# Altium PCB PCB1.PcbDoc
Units mm, origin at the board's own origin, x right, y up, seen from the top; angles counter-clockwise.
Board outline 100.03 x 70 mm, 2 copper layers (L1, L2), stack 1.671 mm thick; 30 components, 25 nets, 116 pads, 81 vias.
Unrouted connection lines stored in the file: 12.
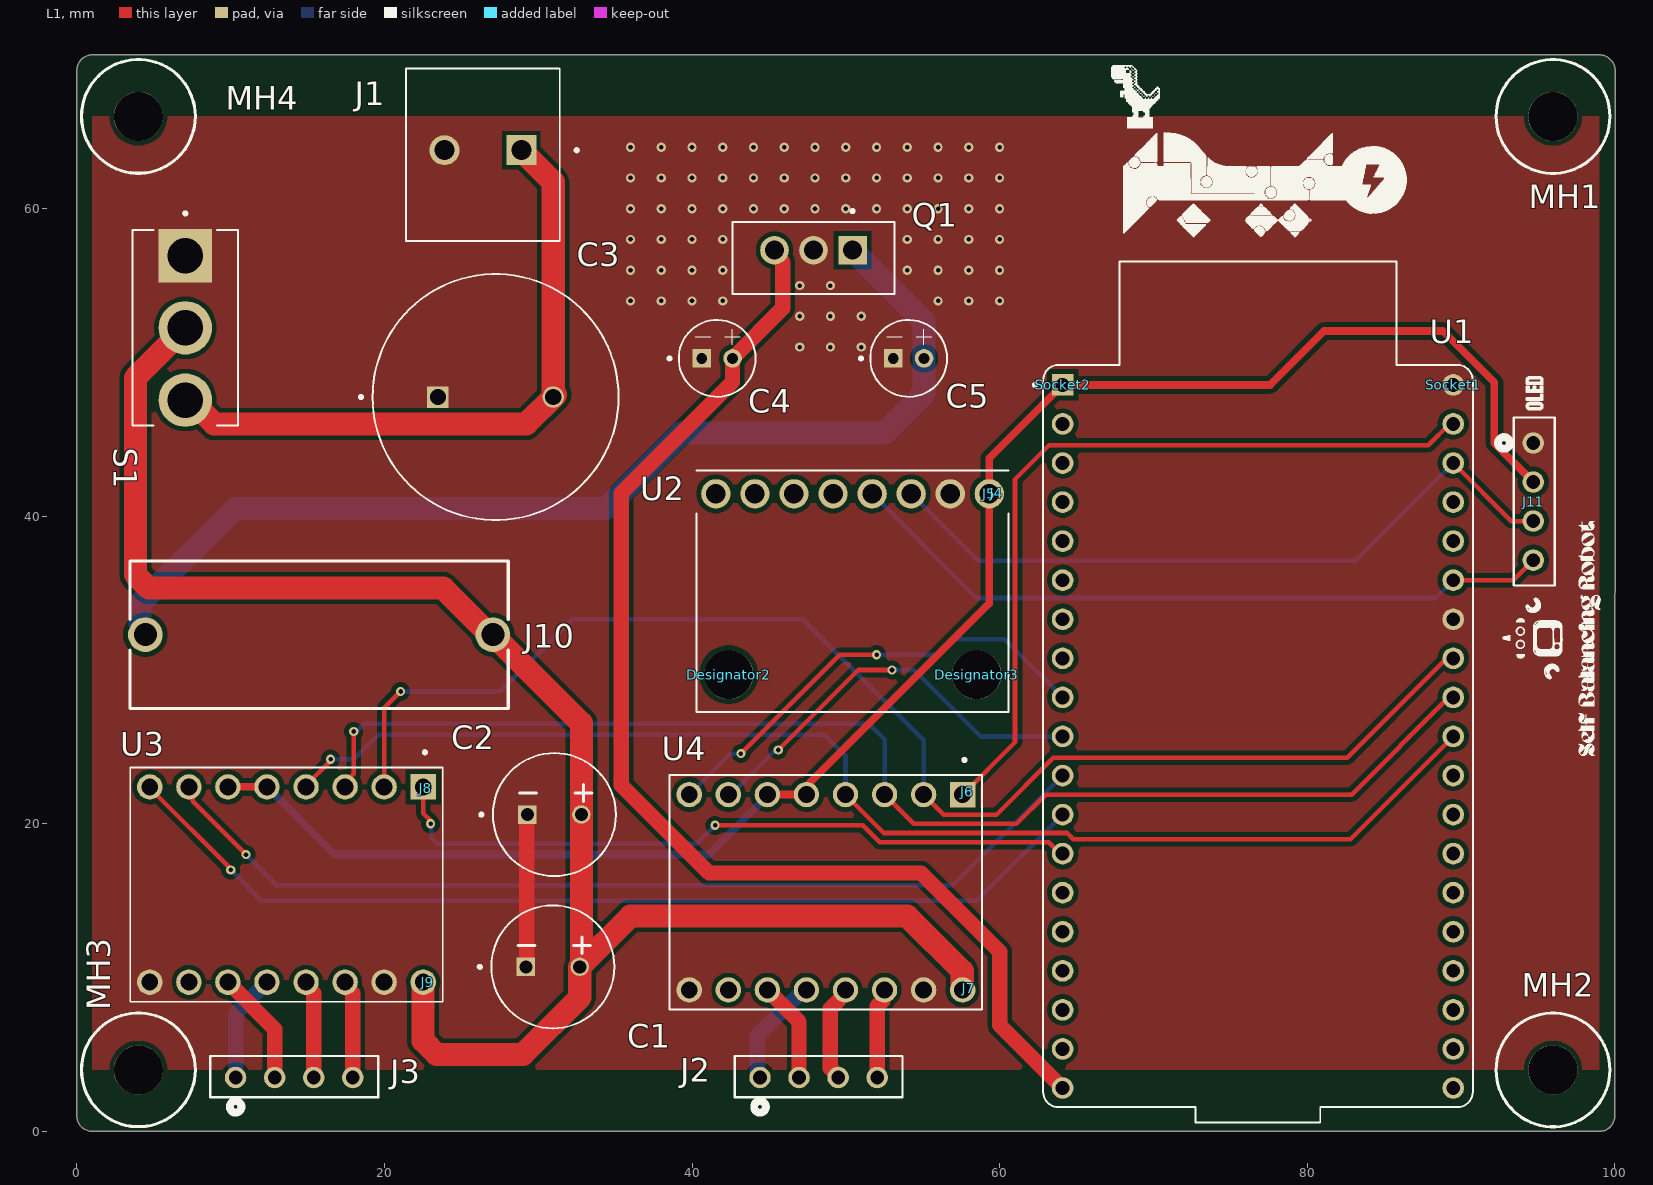
[diagram p0: L1 view]
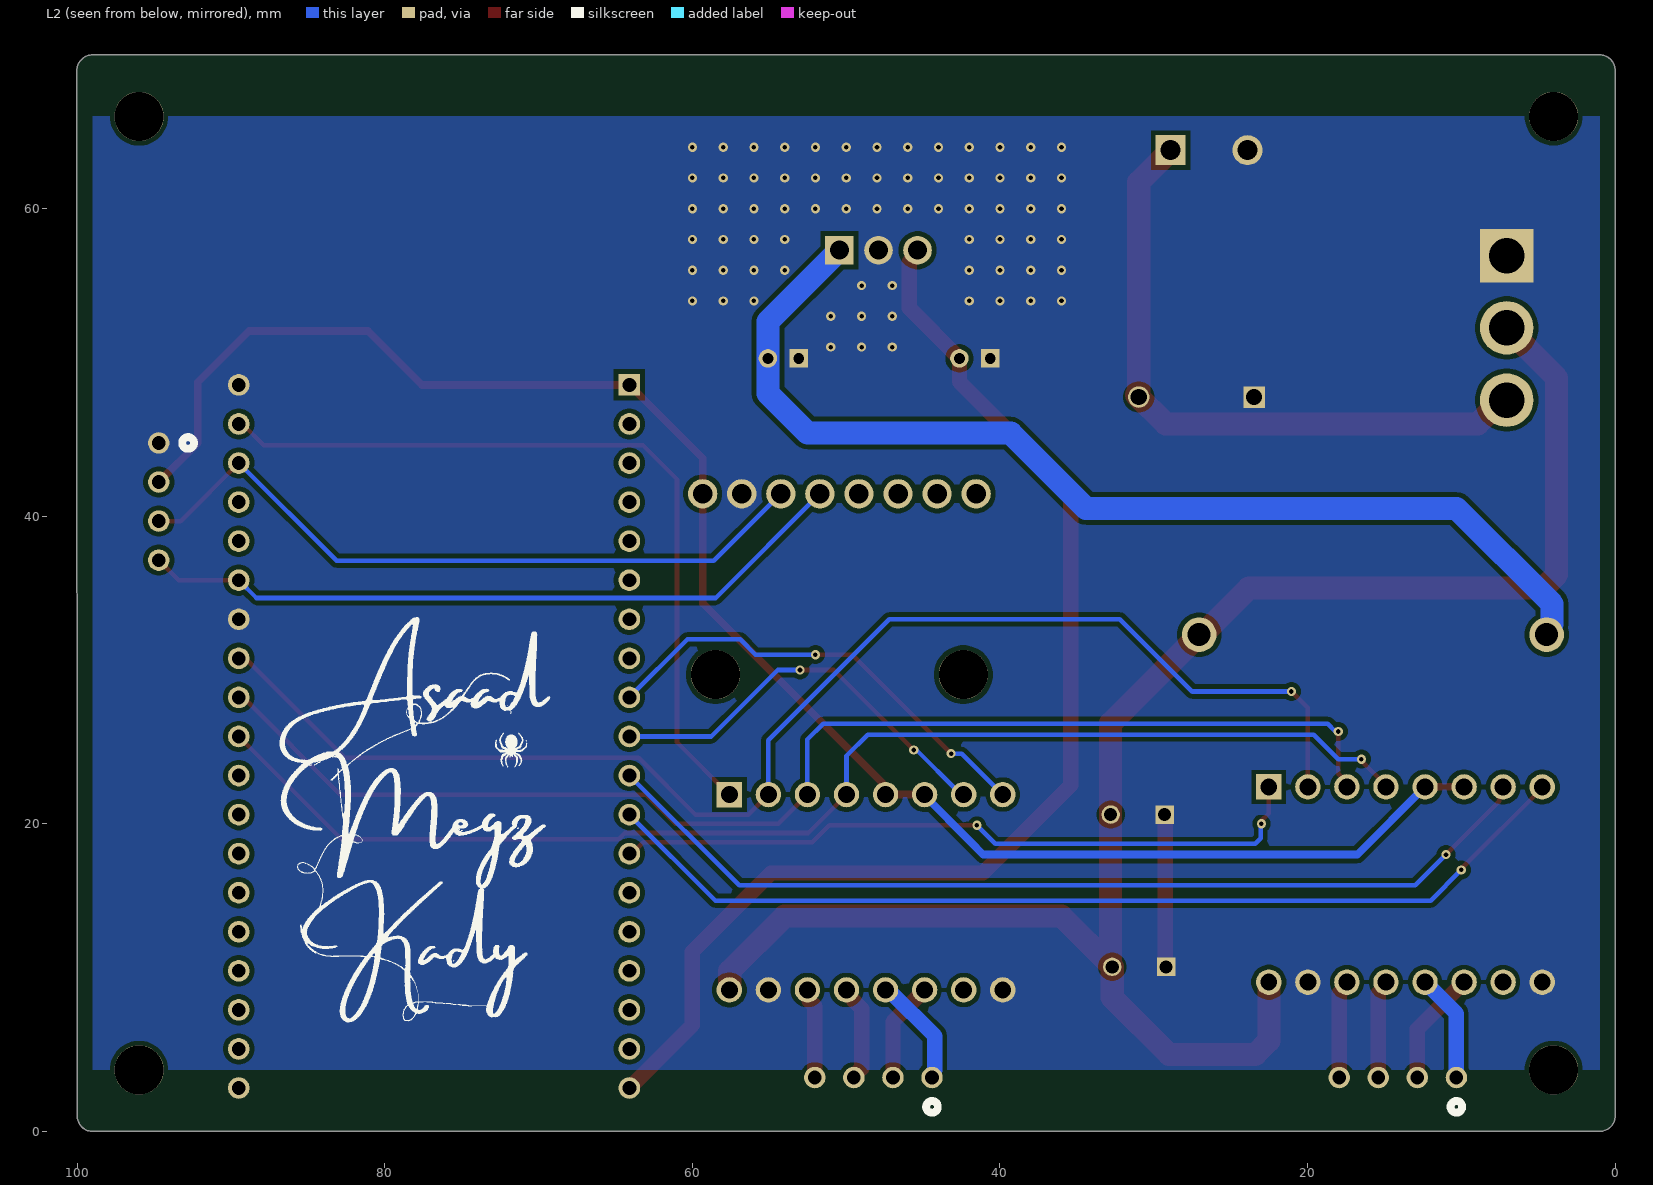
[diagram p1: L2 view, seen from below]
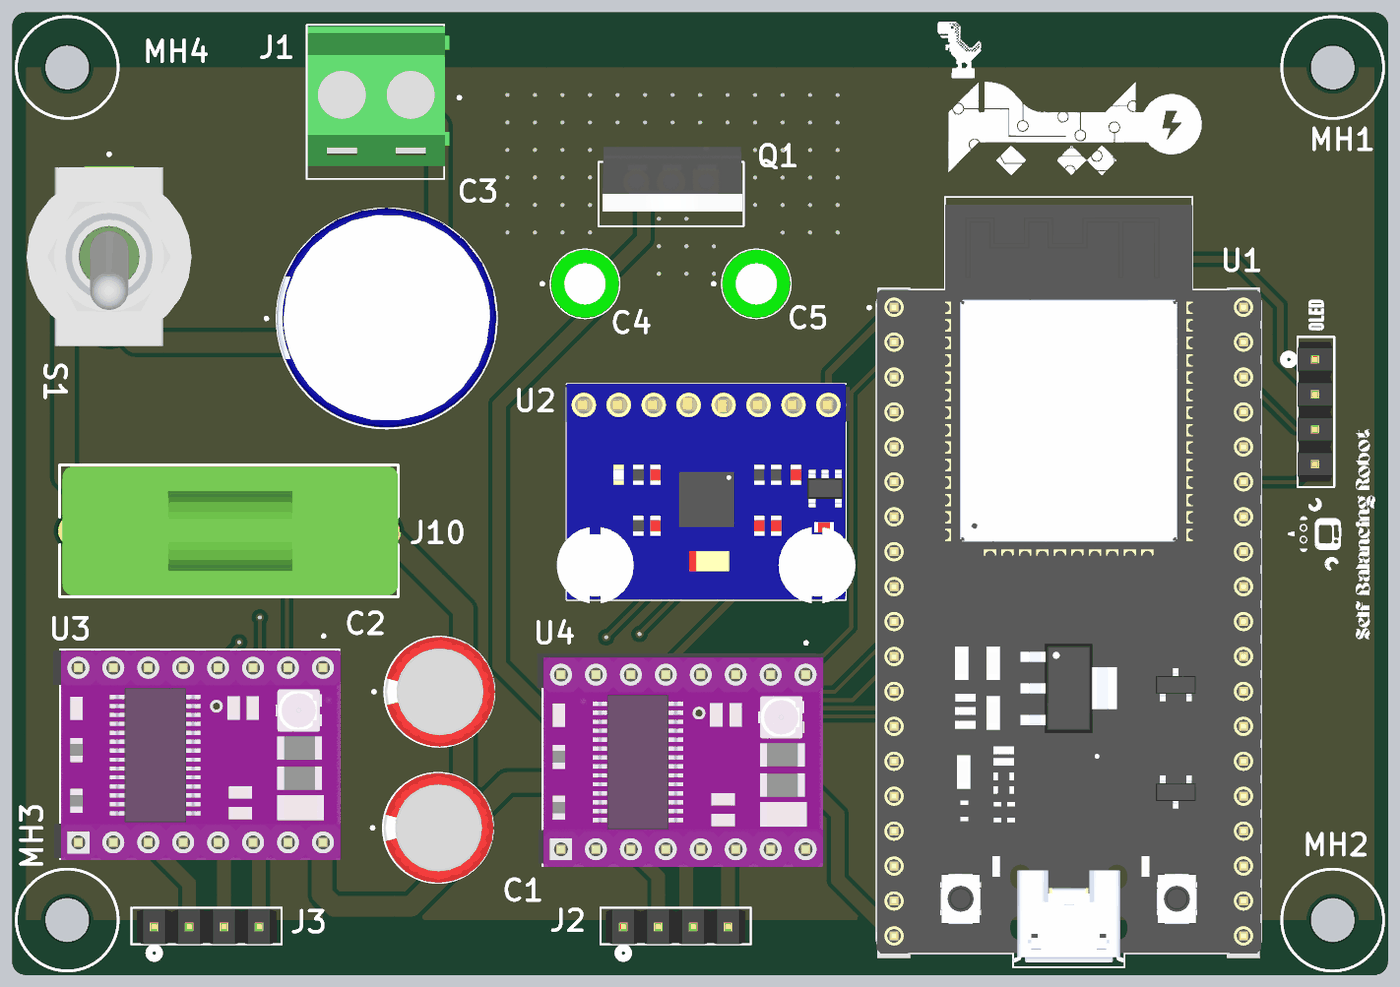
[diagram p2: 3D render of the assembled board from above, using the file's embedded part models]

## Layer stack, top to bottom
Top Solder: solder mask 0.0102, Solder Resist, Dk 3.5
L1: signal copper 0.0356
Dielectric 1: dielectric 1.6, FR-4, Dk 4.8
L2: signal copper 0.0356
Bottom Solder: solder mask 0.0102, Solder Resist, Dk 3.5

## Board outline
0,1 0,69 cw(c1,69) 1,70 99,70 cw(c99,68.975) 100.025,68.975 100,1 cw(c99,1) 99,0 1,0 cw(c1,1)

## Design rules (kind name [scope] priority, off if disabled: settings)
Clearance [All] p1: gap=0.3 ignorepadtopadclearanceinfootprint=FALSE
ComponentClearance [All] p1: gap=0 collisioncheckmode=3 verticalgap=0 showdistances=FALSE
Height [All] p1: minheight=0 maxheight=50 prefheight=12.7
HoleSize [All] p1: absolutevalues=TRUE maxlimit=10 minlimit=0.2 maxpercent=80.000 minpercent=20.000
HoleToHoleClearance [All] p1: gap=0.3 allowstackedmicrovias=TRUE
MinimumSolderMaskSliver [All] p1: minsoldermaskwidth=0.1
PlaneClearance [All] p1: clearance=1
PlaneConnect [All] p1: planeconnectstyle=NoConnect reliefexpansion=0.508 reliefentries=4 reliefconductorwidth=0.254 reliefairgap=0.254
PolygonConnect [All] p1: connectstyle=Direct reliefconductorwidth=0.254 reliefentries=4 polygonreliefangle="90 Angle" airgapwidth=0.254
RoutingVias [All] p1: holewidth=0.3 width=0.6 viastyle="Through Hole" minholewidth=0.3 minwidth=0.6 maxholewidth=0.3 maxwidth=0.6
SilkToSilkClearance [All] p1: silktosilkclearance=0.1
SilkToSolderMaskClearance [IsPad] p1: minsilkscreentomaskgap=0.1 clearancetoexposedcopper=TRUE
SolderMaskExpansion [All] p1: expansion=0.1 istentingtop=FALSE
SupplyNets "Schematic Supply Nets_5" [InNet('+12V')] p1: voltage=0.000
SupplyNets "Schematic Supply Nets_4" [InNet('VOUT_5V')] p2: voltage=0.000
SupplyNets "Schematic Supply Nets_3" [InNet('+3V3')] p3: voltage=0.000
SupplyNets "Schematic Supply Nets_2" [InNet('Vsupply')] p4: voltage=0.000
SupplyNets "Schematic Supply Nets" [InNet('GND')] p5: voltage=0.000
UnRoutedNet [All] p1: checkbadconnections=TRUE
Width [All] p1: maxlimit=1.5 minlimit=0.3 preferedwidth=0.3
20 further rules are at their usual default settings.

## Components (designator, comment, footprint, x,y, rotation, side; value= is the part's Value field where it differs from the comment)
C1 "CAP 100µF" CAP_1µF 30.9,10.7 r0 top
C2 "CAP 100µF" CAP_1µF 31,20.6 r0 top
C3 "2200µF" "CAP 2200UF" 27.2,47.75 r0 top
C4 "0.1µF" "CAP 0.1UF" 41.61,50.264 r0 top
C5 "0.33µF" "CAP 0.1UF" 54.063,50.264 r0 top
Designator2 "Comment" 3M-SCREW 42.38,29.7 r0 top
Designator3 "Comment" 3M-SCREW 58.5,29.7 r0 top
J1 "Terminal Block 2" "TERMINAL BLOCK 2" 28.9,63.8 r180 top
J2 "MHDR_4PINS" MHDR_4PINS 44.407,3.479 r0 top
J3 "MHDR_4PINS" MHDR_4PINS 10.307,3.479 r0 top
J4 "Female_Headers_Stepper" FEMALE_STEPPER 59.8,41.5 r180 top
J5 "MHDR_8PINS" MHDR_8PINS 59.33,41.46 r180 top
J6 "Female_Headers_Stepper" FEMALE_STEPPER 57.9,22.1 r180 top
J7 "Female_Headers_Stepper" FEMALE_STEPPER 58,9.3 r180 top
J8 "Female_Headers_Stepper" FEMALE_STEPPER 22.7,22.3 r180 top
J9 "Female_Headers_Stepper" FEMALE_STEPPER 22.8,9.7 r180 top
J10 "Fuse_Holder" FUSE_HOLDER 15.75,32.3 r0 top
J11 "MHDR_4PINS" MHDR_4PINS 94.679,44.778 r270 top
MH1 "MH_7.4MMNC_3.2MMD (NO COPPER-NPTH)" MH_7.4MMC_3.2MMD_NO_COPPER_NPTH 96,66 r0 top
MH2 "MH_7.4MMNC_3.2MMD (NO COPPER-NPTH)" MH_7.4MMC_3.2MMD_NO_COPPER_NPTH 96,4 r0 top
MH3 "MH_7.4MMNC_3.2MMD (NO COPPER-NPTH)" MH_7.4MMC_3.2MMD_NO_COPPER_NPTH 4.016,4.005 r0 top
MH4 "MH_7.4MMNC_3.2MMD (NO COPPER-NPTH)" MH_7.4MMC_3.2MMD_NO_COPPER_NPTH 4.016,66.005 r0 top
Q1 "LM7805" LM7805 50.398,57.321 r180 top
S1 "Switch" SWITCH 7.05,52.25 r270 top
Socket1 "Female_Headers_FOR_MCU" FEMALE_HEADERS 89.5,48.54 r270 top
Socket2 "Female_Headers_FOR_MCU" FEMALE_HEADERS 64.1,48.54 r270 top
U1 "ESP_32" ESP_32 64.1,48.565 r0 top
U2 "GYROSCOPE" GYROSCOPE 59.322,41.438 r270 top
U3 "DRV8825 Stepper Driver" "DRV8825 STEPPER DRIVER" 22.5,22.393 r270 top
U4 "DRV8825 Stepper Driver" "DRV8825 STEPPER DRIVER" 57.58,21.893 r270 top

## Footprints (in the part's own frame and the unit in brackets; to place one, negate y for a bottom-side part, rotate by r counter-clockwise, add the part's x,y. Pads: shape width x height; smd on the part's side, far side on the other; paste and mask are expansions set on the pad)
3M-SCREW [mm]
  body extent -2.8,-2.67 2.8,2.87, height 13
"CAP 0.1UF" [mm]
  rect 1.208x1.208 / inner round 1.208 / far side rect 1.208x1.208 hole 0.7: N(-0.975,0)
  round 1.208 hole 0.7: P(1.025,0)
  silkscreen extent -3.17,-2.5 2.53,2.5, body extent -2.47,-2.49 2.53,2.49, height 12
"CAP 2200UF" [mm]
  rect 1.4x1.4 hole 1.05: N(-3.725,0)
  round 1.4 hole 1.05: P(3.775,0)
  silkscreen extent -8.82,-8 8.03,8, body extent -7.98,-7.95 8.03,8.05, height 25.01
CAP_1µF [mm]
  rect 1.2x1.2 / inner round 1.2 / far side rect 1.2x1.2 hole 0.85: N(-1.7,0)
  round 1.2 hole 0.85: P(1.8,0)
  silkscreen extent -4.8,-4 4.05,4, body extent -3.9,-4 4.1,4, height 11.74
"DRV8825 STEPPER DRIVER" [mm]
  rect 1.65x1.65 hole 1.1: 1(-0.007,0.02)
  round 1.65 hole 1.1: 2(-0.007,-2.52) 3(-0.007,-5.06) 4(-0.007,-7.6) 5(-0.007,-10.14) 6(-0.007,-12.68) 7(-0.007,-15.22) 8(-0.007,-17.76) 9(12.693,-17.76) 10(12.693,-15.22) 11(12.693,-12.68) 12(12.693,-10.14) 13(12.693,-7.6) 14(12.693,-5.06) 15(12.693,-2.52) 16(12.693,0.02)
  silkscreen extent -2.36,-19.03 13.96,1.29, body extent -1.22,-18.96 14.02,1.36, height 14.49
ESP_32 [mm]
  rect 1.408x1.408 / inner round 1.408 / far side rect 1.408x1.408 hole 0.9: J2_1(0,-0.025)
  round 1.408 hole 0.9: J2_2(0,-2.565) J2_3(0,-5.105) J2_4(0,-7.645) J2_5(0,-10.185) J2_6(0,-12.725) J2_7(0,-15.265) J2_8(0,-17.805) J2_9(0,-20.345) J2_10(0,-22.885) J2_11(0,-25.425) J2_12(0,-27.965) J2_13(0,-30.505) J2_14(0,-33.045) J2_15(0,-35.585) J2_16(0,-38.125) J2_17(0,-40.665) J2_18(0,-43.205) J2_19(0,-45.745) J3_1(25.4,-0.025) J3_2(25.4,-2.565) J3_3(25.4,-5.105) J3_4(25.4,-7.645) J3_5(25.4,-10.185) J3_6(25.4,-12.725) J3_7(25.4,-15.265) J3_8(25.4,-17.805) J3_9(25.4,-20.345) J3_10(25.4,-22.885) J3_11(25.4,-25.425) J3_12(25.4,-27.965) J3_13(25.4,-30.505) J3_14(25.4,-33.045) J3_15(25.4,-35.585) J3_16(25.4,-38.125) J3_17(25.4,-40.665) J3_18(25.4,-43.205) J3_19(25.4,-45.745)
  silkscreen extent -1.9,-47.99 26.67,8.01, body extent -1.27,-47.66 26.67,7.44, height 15.19
FEMALE_HEADERS [mm]
  body extent -1.47,-1.21 47.3,1.21, height 8.51
FEMALE_STEPPER [mm]
  body extent -1.08,-1.3 19.73,1.2, height 8.55
FUSE_HOLDER [mm]
  round 2.25 hole 1.5: 1(-11.3,0) 2(11.3,0)
  silkscreen extent -12.3,-4.8 12.3,4.8, body extent -12.1,-4.7 12.3,4.7, height 24.2
GYROSCOPE [mm]
  round 1.905 hole 1.27 mask+0.102: AD0(-0.022,-15.232) GND(-0.022,-2.532) INT(-0.022,-17.772) SCL(-0.022,-5.072) SDA(-0.022,-7.612) VCC(-0.022,0.008) XCL(-0.022,-12.692) XDA(-0.022,-10.152)
  round 3.2 hole 3.2 unplated mask+0: ""(11.738,-0.822) ""(11.738,-16.942)
  silkscreen extent -1.54,-19.03 14.16,1.27, body extent -1.54,-19.03 14.16,1.27, height 13.6
LM7805 [mm]
  rect 1.86x1.86 / inner round 1.86 / far side rect 1.86x1.86 hole 1.24: 1(-0.042,0.021)
  round 1.86 hole 1.24: 2(2.498,0.021) 3(5.038,0.021)
  silkscreen extent -2.77,-2.62 7.77,2.88, body extent -2.66,-2.9 7.5,1.8, height 15.49
MH_7.4MMC_3.2MMD_NO_COPPER_NPTH [mm]
  round 3.2 hole 3.2 unplated: 1(-0.016,-0.005)
  silkscreen extent -3.72,-3.7 3.68,3.69
MHDR_4PINS [mil]
  round 55 / inner round 60 / far side round 55 hole 35 paste-99999 mask+0: 1(0.51,0.83) 2(100.51,0.83) 3(200.51,0.83) 4(300.51,0.83)
  silkscreen extent -64,-89 366,56, body extent -49,-49 351,51, height 500
MHDR_8PINS [mm]
  body extent -1.3,-1.27 19.15,1.27, height 13.64
SWITCH [mil]
  rect 137x137 / inner round 137 / far side rect 137x137 hole 91: 1(-185,0)
  round 137 hole 91: 2(0,0) 3(185,0)
  silkscreen extent -297,-135 250,135, body extent -256,-236 256,236, height 1157
"TERMINAL BLOCK 2" [mm]
  rect 1.95x1.95 / inner round 1.95 / far side rect 1.95x1.95 hole 1.3: 1(0,0)
  round 1.95 hole 1.3: 2(5,0)
  silkscreen extent -3.7,-5.3 7.5,5.9, body extent -2.86,-5.21 7.44,4.99, height 14.1

## Part data
C3: library part "CAP 2200µF"
C4: library part "CAP 0.1µF"
C5: library part "CAP 0.33µF"
MH1 MH2 MH3 MH4: library part MH_7.4MMNC_3.2MMD_1

## Via types
v1: diameter 0.6, hole 0.3, L1 to L2, tented both sides, 81 vias

## Nets (pads, with @x,y where several pads share a name; then routed paths per layer and width w, separated by ;. In a path a pad name is that pad's centre, name@x,y a point inside that pad or via, vN(x,y) a via of type N, cw(c..) or ccw(c..) an arc to the next point about the centre after c; other vN are vias at no path point)
+3V3: J11.2 U1.J2_1 U2.VCC U3.5 U3.6 U4.5 U4.6 | length 113.1
  L1 w0.5: U3.6 U3.5 ; U4.6 U4.5 47.66,22.12 47.66,22.66 59.33,34.33 U2.VCC 59.33,43.77 U1.J2_1 77.59,48.54 81.1,52.05 88.825,52.05 92.175,48.7 92.175,44.75 J11.2
  L2 w0.5: U3.5 16.76,18 41.085,18 41.935,18.85 44.9,21.815 U4.6
+12V: C3.P J1.1 S1.3 | length 42.4
  L1 w1.5: S1.3 7.368,47.551 8.919,46 29.225,46 C3.P@31.125,47.9 ; J1.1 29.125,63.575 30.975,61.725 C3.P
A1-L: J3.1 U3.12 | length 7
  L2 w1: J3.1 10.32,7.66 U3.12
A1-R: J2.1 U4.12 | length 7.2
  L2 w1: J2.1 44.344,3.576 44.344,3.857 44.236,3.964 44.236,6.196 47.116,9.076 47.316,9.076 U4.12
A2-L: J3.2 U3.11 | length 7.5
  L1 w1: U3.11 12.86,6.66 J3.2
A2-R: J2.2 U4.11 | length 6.6
  L1 w1: U4.11 46.96,7.14 J2.2
B1-L: J3.3 U3.13 | length 6.4
  L1 w0.8: U3.13 14.9,9.47 15.4,8.97
  L1 w1: J3.3 15.4,8.97
B1-R: J2.3 U4.13 | length 6.3
  L1 w0.8: 49.5,8.49 49.98,8.97 U4.13
  L1 w1: J2.3 49.5,3.607 49,4.107 49,7.99 49.5,8.49
B2-L: J3.4 U3.14 | length 6.4
  L1 w1: U3.14 17.44,9.47 17.94,8.97 J3.4
B2-R: J2.4 U4.14 | length 5.9
  L1 w1: J2.4 52.04,8.138 52.396,8.493 52.396,9.076 U4.14
DIR_LEFT: U1.J2_12 U3.8 | length 64.8
  L1 w0.3: U3.8 4.74,22.33 10,17.07 v1(10,17)
  L2 w0.3: v1(10,17) 12,15 58.5,15 U1.J2_12
DIR_RIGHT: U1.J2_9 U4.8 | length 30
  L1 w0.3: v1(43.176,24.566) 49.61,31 v1(52,31)
  L2 w0.3: U4.8 42.486,24.566 v1(43.176,24.566) ; v1(52,31) 55.895,31 56.895,32 60.32,32 U1.J2_9
EN_L: U1.J2_13 U3.1 | length 46
  L1 w0.3: U3.1 22.52,20.669 23,20.189 v1(23,20) ; v1(41.5,19.9) 51.1,19.9 52.2,18.8 63.208,18.8 63.948,18.06 U1.J2_13
  L2 w0.3: v1(23,20) 23.045,19.955 23.045,19.05 23.395,18.7 40.3,18.7 v1(41.5,19.9)
EN_R: U1.J3_2 U4.1 | length 51.9
  L1 w0.3: U4.1 61,25.3 61,42.4 63.214,44.614 87.868,44.614 89.254,46 U1.J3_2
GND: C1.N C2.N C3.N C4.N C5.N J1.2 J11.1 Q1.2 S1.1 U1.J3_1 U1.J3_7 U2.GND U3.9 U3.15 U4.9 U4.15 | length 9.9
  L1 w1: C1.N 29.25,10.75 29.25,20.55 C2.N
  other v1: 47,51 49,51 51,51 47,53 49,53 51,53 36,54 38,54 40,54 42,54 56,54 58,54 60,54 47,55 49,55 36,56 38,56 40,56 42,56 54,56 56,56 58,56 60,56 36,58 38,58 40,58 42,58 54,58 56,58 58,58 60,58 36,60 38,60 40,60 42,60 44,60 46,60 48,60 50,60 52,60 54,60 56,60 58,60 60,60 36,62 38,62 40,62 42,62 44,62 46,62 48,62 50,62 52,62 54,62 56,62 58,62 60,62 36,64 38,64 40,64 42,64 44,64 46,64 48,64 50,64 52,64 54,64 56,64 58,64 60,64
M0: U1.J3_8 U3.2 U4.2 | length 88.8
  L1 w0.3: U3.2 19.98,27.555 21.025,28.6 v1(21.05,28.6) ; U4.2 56.36,20.6 59.8,20.6 63.5,24.3 82.6,24.3 88.848,30.548 89.288,30.548 U1.J3_8
  L2 w0.3: U3.2 U3.2@19.98,22.563 ; v1(21.05,28.6) 27.5,28.6 32.2,33.3 47.2,33.3 55.06,25.44 U4.2
M1: U1.J3_9 U3.3 U4.3 | length 83.7
  L1 w0.3: U3.3 17.44,22.691 18,23.251 v1(18,26) ; U4.3 54.42,20 61.1,20 63,21.9 82.9,21.9 89.22,28.22 U1.J3_9
  L2 w0.3: v1(18,26) 18.189,26 18.689,26.5 51.5,26.5 52.52,25.48 U4.3
M2: U1.J3_10 U3.4 U4.4 | length 83.2
  L1 w0.3: U3.4 14.9,22.5 16.5,24.1 v1(16.5,24.2) ; U4.4 52.48,19.4 64.392,19.4 64.792,19 82.82,19 U1.J3_10
  L2 w0.3: v1(16.5,24.2) 18,24.2 19.6,25.8 48.6,25.8 49.98,24.42 U4.4
NetC5_P: C5.P J10.1 Q1.1 | length 69.2
  L2 w1.5: J10.1@4.1,33 4.1,34.3 10.3,40.5 34.4,40.5 39.3,45.4 52.5,45.4 55.088,47.988 C5.P 55.088,52.652 Q1.1
SCL: J11.3 U1.J3_3 U2.SCL | length 46.5
  L1 w0.3: U1.J3_3 93.275,39.685 J11.3
  L2 w0.3: U2.SCL 58.61,37.1 83.14,37.1 U1.J3_3
SDA: J11.4 U1.J3_6 U2.SDA | length 46.8
  L1 w0.3: U1.J3_6 93.395,35.84 J11.4
  L2 w0.3: U2.SDA 58.484,34.686 88.346,34.686 U1.J3_6
STEP_LEFT: U1.J2_11 U3.7 | length 62.8
  L1 w0.3: U3.7 7.538,22.142 7.538,21.462 v1(11,18)
  L2 w0.3: v1(11,18) 13,16 56.96,16 U1.J2_11
STEP_RIGHT: U1.J2_10 U4.7 | length 26.9
  L1 w0.3: v1(45.6,24.8) 50.8,30 v1(53,30)
  L2 w0.3: U4.7 42.618,22.158 42.788,22.158 45.43,24.8 v1(45.6,24.8) ; v1(53,30) 54.445,30 58.765,25.68 U1.J2_10
VOUT_5V: C4.P Q1.3 U1.J2_19 | length 79
  L1 w1: C4.P 42.636,48.736 35.4,41.5 35.4,22.5 41.1,16.8 54.9,16.8 60,11.7 60,6.92 U1.J2_19 ; C4.P@42.675,50.304 45.9,53.529 45.9,55.456 45.9,56.527 45.36,57.067 Q1.3
Vsupply: C1.P C2.P J10.2 S1.2 U3.16 U4.16 | length 113
  L1 w1.5: S1.2 3.8,49 3.8,36.204 4.679,35.325 23.822,35.325 26.847,32.3 J10.2 32.8,26.55 C1.P@32.8,10.8 ; U3.16 22.52,5.879 23.399,5 29,5 32.7,8.7 C1.P 36,14 54,14 57.571,10.429 57.571,9.229 U4.16
pads on no net: MH1.1 MH2.1 MH3.1 MH4.1 U1.J2_2 U1.J2_3 U1.J2_4 U1.J2_5 U1.J2_6 U1.J2_7 U1.J2_8 U1.J2_14 U1.J2_15 U1.J2_16 U1.J2_17 U1.J2_18 U1.J3_4 U1.J3_5 U1.J3_11 U1.J3_12 U1.J3_13 U1.J3_14 U1.J3_15 U1.J3_16 U1.J3_17 U1.J3_18 U1.J3_19 U2. U2.AD0 U2.INT U2.XCL U2.XDA U3.10 U4.10

## Polygon pours and split planes (outlines as drawn)
GND on L2 "GND_L02_P000" (solid, remove dead copper, pour order 0): 1,65.995 4.005,65.995 99,65.995 99,4 95.979,4 1,4
GND on L1 "GND_L01_P004" (solid, remove dead copper, pour order 4): 1,66 99,66 99,4 1,4

## Silkscreen, mask and mechanical layers (free items; w line width, h text height)
Top Overlay:
  drawing of 44 lines, arcs and shapes, not listed
Bottom Overlay:
  drawing of 12 lines, arcs and shapes, not listed
Mechanical 1:
  lines w0.2: 0,69 cw(c1,69) 1,70 99,70 cw(c99,68.975) 100.025,68.975 100,1 cw(c99,1) 99,0 1,0 ; 0,69 ccw(c0,69) 0,69 ; 0,69 ccw(c0,69) 0,69 ; 0,69 0,1 ccw(c1,1) 1,0 ; 1,0 ccw(c1,0) 1,0 ; 130,69 ccw(c130,69) 130,69

## Dimensions
0,1 to 100,1 on Mechanical 1
0,0 to -0.025,70 on Mechanical 1